# Altium PCB CR00045.PcbDoc
Units mm, origin at the board's own origin, x right, y up, seen from the top; angles counter-clockwise.
Board outline 18 x 19 mm, 4 copper layers (L 01 (Top), L 02, L 03, L 04), stack 1.959 mm thick; 17 components, 42 nets, 107 pads, 36 vias.
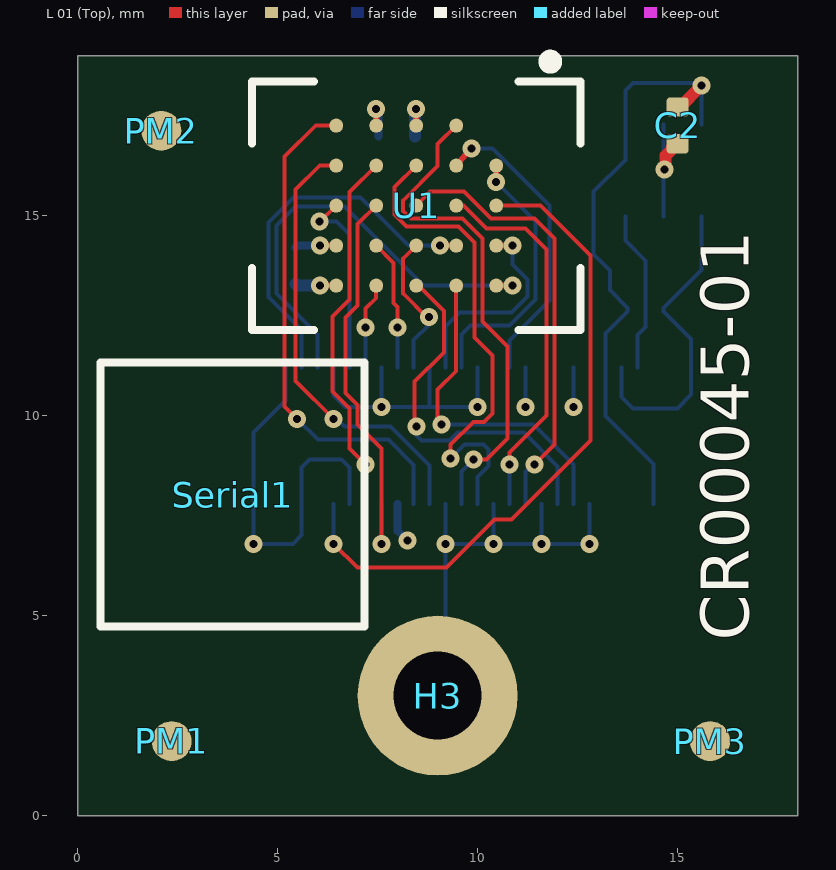
[diagram p0: L 01 (Top) view]
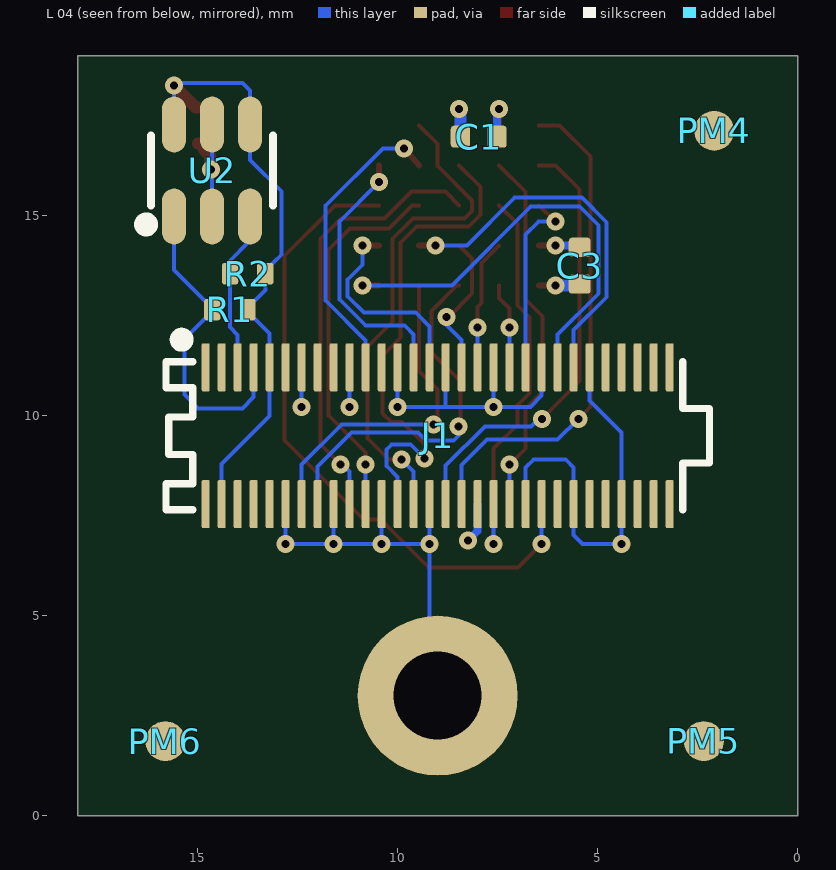
[diagram p1: L 04 view, seen from below]
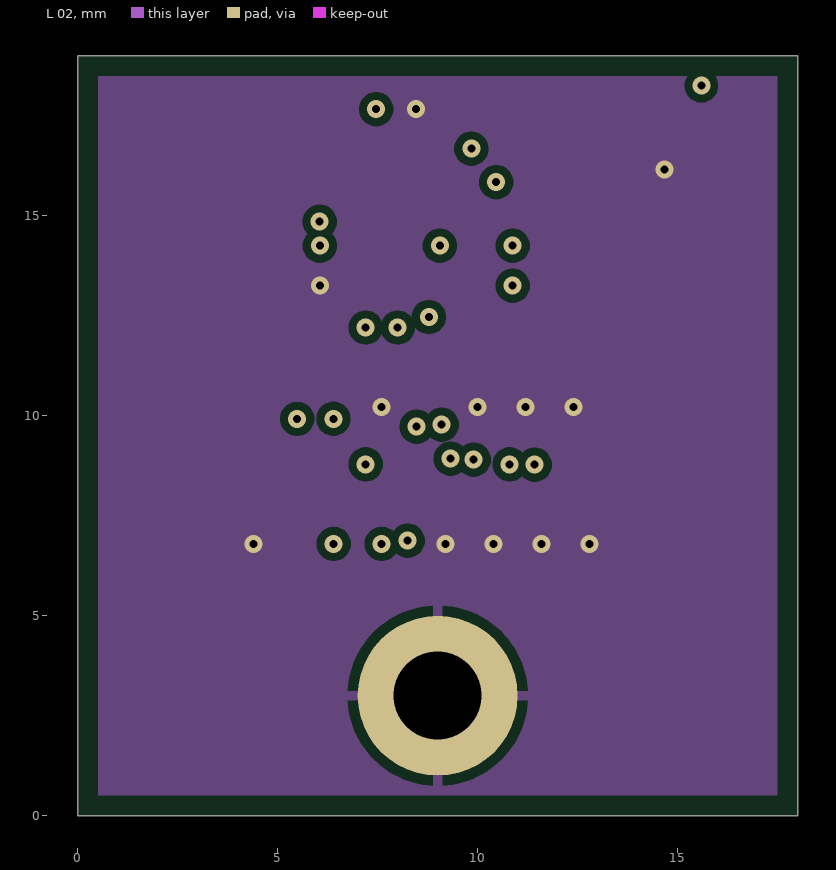
[diagram p2: L 02]
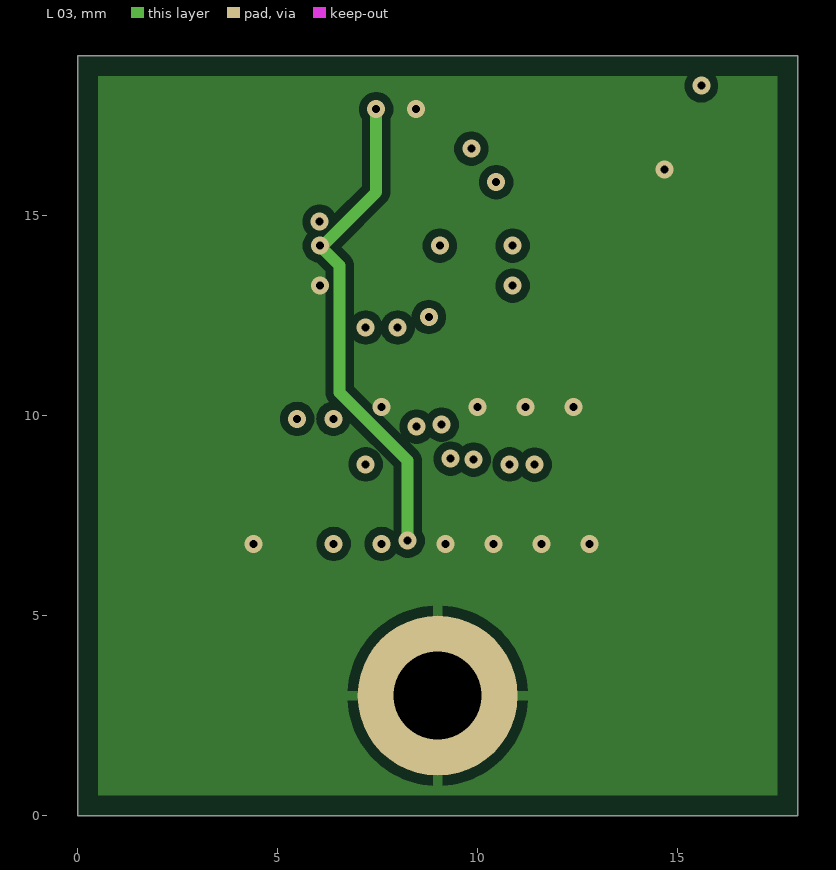
[diagram p3: L 03]

## Layer stack, top to bottom
Top Solder: solder mask 0.0102, Solder Resist, Dk 3.5
L 01 (Top): signal copper 0.053
Dielectric1: core 1.4, FR-4, Dk 4.2
L 02: signal copper 0.036
Dielectric 3: prepreg 0.127, Dk 4.2
L 03: signal copper 0.036
Dielectric 2: core 0.254, Dk 4.2
L 04: signal copper 0.053
Bottom Solder: solder mask 0.0102, Solder Resist, Dk 3.5

## Board outline
0,0 0,19 18.001,19 18.001,0

## Design rules (kind name [scope] priority, off if disabled: settings)
BoardOutlineClearance [All] p1: gap=0 except(0.5: Arc-OutlineEdge Track-OutlineEdge SMDPad-OutlineEdge THPad-OutlineEdge Via-OutlineEdge Fill-OutlineEdge Poly-OutlineEdge Region-OutlineEdge)
Clearance "HV Clearance" [(InNetClass('HV') AND InPolygon)] p1: gap=0.3
Clearance Clearance_ToUnplatedHole [IsPad and ( (HoleSize = 1.5) or (HoleSize = 3.25) ) vs (IsVia or IsTrack OR InPoly)] p2: gap=0.2
Clearance Clearance_DiffPair [(InDifferentialPairClass('All Differential Pairs')) vs (InPolygon)] p3: gap=0.3
Clearance Clearance_PolyToPoly [(InPolygon) vs InNamedPolygon('L01_U1_IN') or    InNamedPolygon('L01_U1_OUT') or InNamedPolygon('L01_U1_PGND')   or InNamedPolygon('L01_U2_IN') or    InNamedPolygon('L01_U2_OUT') or InNamedPolygon('L01_U2_PGND')] p4: gap=0.2
Clearance Clearance_Polygon [(InPolygon)] p5: gap=0.2 except(0.7: Poly-Poly)
Clearance [All] p6: gap=0.125 except(0.1: Track-Track Track-SMDPad Track-Via SMDPad-Via)
ComponentClearance ComponentClearance_logo [(HasFootprint('LOGO PRINT') or HasFootprint('FIDU-DOT - small'))] p1: gap=-0.05 collisioncheckmode=3 verticalgap=-0.1 showdistances=FALSE
ComponentClearance [All] p2: gap=-0.05 collisioncheckmode=3 verticalgap=0.254 showdistances=FALSE
DiffPairsRouting [InNetClass('Diff_IO') and not TouchesRoom('Room_MAX10')] p1: maxlimit=1 minlimit=0.16 mostfreqgap=1 toplayer_maxgap=0.16 toplayer_prefgap=0.16 toplayer_minwidth=0.11 toplayer_maxwidth=0.11 toplayer_prefwidth=0.11 midlayer1_mingap=1 midlayer1_minwidth=0.381 midlayer1_maxwidth=0.381 midlayer1_prefwidth=0.381 midlayer2_mingap=0.2 midlayer2_maxgap=0.2 midlayer2_prefgap=0.2 midlayer2_minwidth=0.1 midlayer2_maxwidth=0.1 midlayer2_prefwidth=0.1 bottomlayer_maxgap=0.16 bottomlayer_prefgap=0.16 bottomlayer_minwidth=0.11 bottomlayer_maxwidth=0.11 bottomlayer_prefwidth=0.11 maxuncoupledlength=2
FabricationTestPointUsage TestPointUsage [All] p1: valid=0 allowmultiple=FALSE
FabricationTestpoint Testpoint [All] p1: side=3 testpointundercomponent=TRUE minsize=1.016 maxsize=2.54 preferedsize=1.524 minholesize=0 maxholesize=1.016 preferedholesize=0.813 testpointgrid=0.025 allowsidetop=TRUE allowsidebottom=TRUE usegrid=TRUE gridtolerance=0
HoleSize [All] p1: absolutevalues=TRUE maxlimit=5 minlimit=0.2 maxpercent=80.000 minpercent=20.000
MinimumAnnularRing [All] p1: minimumring=0.15
MinimumSolderMaskSliver [All] p1: minsoldermaskwidth=0.1
PlaneClearance [All] p1: clearance=0.4
PlaneConnect [All] p1: planeconnectstyle=Direct reliefexpansion=0.508 reliefentries=4 reliefconductorwidth=0.254 reliefairgap=0.254
PolygonConnect [IsVia] p1: connectstyle=Direct reliefconductorwidth=0.254 reliefentries=4 polygonreliefangle="90 Angle" airgapwidth=0.254
PolygonConnect PolygonConnect_1 [All] p2: connectstyle=Relief reliefconductorwidth=0.254 reliefentries=4 polygonreliefangle="90 Angle" airgapwidth=0.254
RoutingCorners [All] p1: cornerstyle=Round minsetback=2 maxsetback=2
RoutingVias [All] p1: holewidth=0.3 width=0.6 viastyle="Through Hole" minholewidth=0.2 minwidth=0.5 maxholewidth=1 maxwidth=3
SilkToSilkClearance [All] p1: silktosilkclearance=0.025
SilkToSolderMaskClearance SilkscreenOverComponentPads [IsPad] p1: minsilkscreentomaskgap=0.01 clearancetoexposedcopper=TRUE
SolderMaskExpansion SolderMaskExpansion_VIA [(IsVia)] p1: expansion=0 soldermaskfromhole=TRUE
SolderMaskExpansion [All] p2: expansion=0
Width [All] p1: maxlimit=3 minlimit=0.1 preferedwidth=0.2 toplayer_prefwidth=0.1 midlayer1_minwidth=0.11 bottomlayer_prefwidth=0.1 minimp=50.000000 maximp=50.000000 favimp=50.000000 checkconnectedcopper=TRUE
19 further rules are at their usual default settings.

## Classes and differential pairs
component class CR00042: PM1 PM2 PM3 PM4 PM5 PM6 Serial1
component class CRUVI: C1 C2 C3 H3 J1 R1 R2 SNAP1 U1 U2

## Components (designator, comment, footprint, x,y, rotation, side; value= is the part's Value field where it differs from the comment)
C1 "470nF" CAPC1005X55N_V 7.975,16.975 r270 bottom
C2 "470nF" CAPC1005X55N_V 14.998,17.257 r0 top
C3 "470nF" CAPC1005X55N_V 5.45,13.75 r180 bottom
H3 "Mount.Hole 2mm" MHole2_2mm 9,3 r0 top locked
J1 "ST4-30-1.50-L-D-P-TR" ST4-30-1_50-L-D 9,9.5 r180 bottom locked
PM1 "FIDU-DOT - mini" "FIDU-DOT - mini" 2.348,1.865 r0 top
PM2 "FIDU-DOT - mini" "FIDU-DOT - mini" 2.089,17.124 r0 top
PM3 "FIDU-DOT - mini" "FIDU-DOT - mini" 15.808,1.865 r90 top
PM4 "FIDU-DOT - mini" "FIDU-DOT - mini" 2.089,17.124 r180 bottom
PM5 "FIDU-DOT - mini" "FIDU-DOT - mini" 2.348,1.865 r180 bottom
PM6 "FIDU-DOT - mini" "FIDU-DOT - mini" 15.808,1.865 r90 bottom
R1 "4K7" RESC1005X40N_V 14.195,12.653 r270 bottom
R2 "4K7" RESC1005X40N_V 13.75,13.55 r270 bottom
Serial1 "Serialnumber 6,3 x 6.3mm" Serial_6.3x6.3mm 3.875,8.025 r0 top
SNAP1 "SNAP CRUVI 3x" CRUVI_3X_SNAP 31.86,28 r0 top locked
U1 "APS25616N-OBR-BG NOT CHECKED!!!" BGA24C100P5X5_800X600X120N 8.463,15.251 r270 top locked
U2 "24AA025E48T-I/OT" SOT95P280X145-6N 14.641,16.132 r90 bottom locked

## Footprints (in the part's own frame and the unit in brackets; to place one, negate y for a bottom-side part, rotate by r counter-clockwise, add the part's x,y. Pads: shape width x height; smd on the part's side, far side on the other; paste and mask are expansions set on the pad)
BGA24C100P5X5_800X600X120N [mm]
  round 0.35 smd: A2(-1,2) A3(0,2) A4(1,2) A5(2,2) B1(-2,1) B2(-1,1) B3(0,1) B4(1,1) B5(2,1) C1(-2,0) C2(-1,0) C3(0,0) C4(1,0) C5(2,0) D1(-2,-1) D2(-1,-1) D3(0,-1) D4(1,-1) D5(2,-1) E1(-2,-2) E2(-1,-2) E3(0,-2) E4(1,-2) E5(2,-2)
  silkscreen extent -3.75,-4.11 3.11,4.11, body extent -3,-4 3,4, height 1.2
CAPC1005X55N_V [mm] "Vishay VJ0402 1 x 0.5mm (+/- 0.05), 0.25mm +0.05/-0.1mm Kontakte"
  rrect33% 0.55x0.48 smd: 1(0,0.46) 2(0,-0.46)
  body extent -0.25,-0.5 0.25,0.5, height 0.5
CRUVI_3X_SNAP [mm]
"FIDU-DOT - mini" [mm]
  round 1 smd paste-1: 0(0,0)
MHole2_2mm [mm]
  round 4 hole 2.2: 1(0,0)
RESC1005X40N_V [mm] "Vishay D0402 1 x 0.5mm (+/- 0.05), 0.2mm +/-0.1mm Kontakte"
  rrect33% 0.54x0.41 smd: 1(0,0.44) 2(0,-0.44)
  body extent -0.25,-0.5 0.25,0.5, height 0.4
Serial_6.3x6.3mm [mm]
  silkscreen extent -3.3,-3.3 3.3,3.3, body extent -3,-3 3,3, height 0.21
SOT95P280X145-6N [mm]
  oval 1.4x0.6 smd: 1(-1.15,0.95) 2(-1.15,0) 3(-1.15,-0.95) 4(1.15,-0.95) 5(1.15,0) 6(1.15,0.95)
  silkscreen extent -1.5,-1.53 0.87,1.8, body extent -1.35,-1.45 1.35,1.45, height 1.45
ST4-30-1_50-L-D [mm]
  rrect33% 0.2x1.2 smd: 1(-5.8,1.71) 2(-5.8,-1.71) 3(-5.4,1.71) 4(-5.4,-1.71) 5(-5,1.71) 6(-5,-1.71) 7(-4.6,1.71) 8(-4.6,-1.71) 9(-4.2,1.71) 10(-4.2,-1.71) 11(-3.8,1.71) 12(-3.8,-1.71) 13(-3.4,1.71) 14(-3.4,-1.71) 15(-3,1.71) 16(-3,-1.71) 17(-2.6,1.71) 18(-2.6,-1.71) 19(-2.2,1.71) 20(-2.2,-1.71) 21(-1.8,1.71) 22(-1.8,-1.71) 23(-1.4,1.71) 24(-1.4,-1.71) 25(-1,1.71) 26(-1,-1.71) 27(-0.6,1.71) 28(-0.6,-1.71) 29(-0.2,1.71) 30(-0.2,-1.71) 31(0.2,1.71) 32(0.2,-1.71) 33(0.6,1.71) 34(0.6,-1.71) 35(1,1.71) 36(1,-1.71) 37(1.4,1.71) 38(1.4,-1.71) 39(1.8,1.71) 40(1.8,-1.71) 41(2.2,1.71) 42(2.2,-1.71) 43(2.6,1.71) 44(2.6,-1.71) 45(3,1.71) 46(3,-1.71) 47(3.4,1.71) 48(3.4,-1.71) 49(3.8,1.71) 50(3.8,-1.71) 51(4.2,1.71) 52(4.2,-1.71) 53(4.6,1.71) 54(4.6,-1.71) 55(5,1.71) 56(5,-1.71) 57(5.4,1.71) 58(5.4,-1.71) 59(5.8,1.71) 60(5.8,-1.71)
  silkscreen extent -6.79,-1.85 6.79,2.55, body extent -6.87,-2 6.71,2, height 3.56

## Part data
C1 C2 C3: library part 23659, "KON 470nF 6,3V X5R SMD BF 1005 (0402)"
H3: library part 27273
J1: library part 29686
PM1 PM2 PM3 PM4 PM5 PM6: library part 27037, "FIDU-DOT - MINI 0.5mm"
R1 R2: library part 22585, "WID SMD 4K7 1% 0,063W BF 1005 (0402)"
Serial1: library part 26753
SNAP1: library part 29977, "SNAP for CRUVI 3x"
U1: library part 30935, "APS25616N-OBR-BG"
U2: library part 26249

## Via types
v1: diameter 0.45, hole 0.2, L 01 (Top) to L 04, 36 vias

## Nets (pads, with @x,y where several pads share a name; then routed paths per layer and width w, separated by ;. In a path a pad name is that pad's centre, name@x,y a point inside that pad or via, vN(x,y) a via of type N, cw(c..) or ccw(c..) an arc to the next point about the centre after c; other vN are vias at no path point)
+3.3V_D: C2.1 J1.4 J1.9 R1.1 R2.1 U2.4 U2.6 | length 15.6
  L 01 (Top) w0.3: C2.1@14.998,17.707 15.048,17.707 v1(15.591,18.249)
  L 04 w0.1: 13.115,13.816 13.305,13.626 13.305,13.143 13.75,12.698 13.75,12.608 13.2,12.058 J1.9 13.2,9.989 14.4,8.789 J1.4 ; 13.115,13.817 12.9,14.032 12.9,15.6 13.691,16.391 U2.4 13.691,18.131 13.878,18.318 15.591,18.318 v1(15.591,18.249) U2.6
+5.0V_D: J1.60
B0_N: J1.17
B0_P: J1.15
CE: J1.44 U1.A3 | length 16.5
  L 01 (Top) w0.1: v1(6.4,6.795) 6.995,6.2 9.225,6.2 10.425,7.4 10.85,7.4 12.825,9.375 12.825,14 11.574,15.251 U1.A3
  L 04 w0.1: v1(6.4,6.795) J1.44
CLK: J1.21 U1.B2 | length 7.6
  L 01 (Top) w0.15: U1.B2 9.789,16.626 9.809,16.635 9.849,16.655 v1@9.883,16.671
  L 04 w0.1: v1(9.839,16.676) 10.374,16.676 11.8,15.25 11.8,12.875 10.8,11.875 J1.21
D0: J1.38 U1.D3 | length 10.1
  L 01 (Top) w0.1: U1.D3 7,14.788 7,12.75 6.7,12.45 6.7,10.567 7,10.267 7,9.775 7.6,9.175 v1(7.6,6.795)
  L 04 w0.1: v1(7.6,6.795) J1.38
D1: J1.40 U1.D2 | length 9.3
  L 01 (Top) w0.1: v1(7.2,8.785) 6.8,9.185 6.8,10.184 6.375,10.609 6.375,12.475 6.8,12.9 6.8,15.588 U1.D2
  L 04 w0.1: J1.40 v1(7.2,8.785)
D2: J1.33 U1.C4 | length 3.6
  L 01 (Top) w0.1: U1.C4 8.138,13.926 8.138,13.05 v1@8.749,12.439
  L 04 w0.1: J1.33 8.4,11.892 8.777,12.269 v1(8.777,12.468)
D3: J1.35 U1.D4 | length 3.3
  L 01 (Top) w0.1: U1.D4 7.9,13.814 7.9,12.823 8,12.723 v1(8,12.205)
  L 04 w0.1: J1.35 v1(8,12.205)
D4: J1.39 U1.D5 | length 2.1
  L 01 (Top) w0.1: v1(7.2,12.205) 7.2,12.685 7.463,12.947 U1.D5
  L 04 w0.1: J1.39 v1(7.2,12.205)
D5: J1.41 U1.E3 | length 4.8
  L 01 (Top) w0.1: v1(6.05,14.85) 6.062,14.85 U1.E3
  L 04 w0.1: v1(6.05,14.85) 6.475,14.85 6.8,14.525 J1.41
D6: J1.32 U1.E2 | length 11.2
  L 01 (Top) w0.1: v1(6.393,9.924) 5.45,10.867 5.45,15.65 6.051,16.251 U1.E2
  L 04 w0.1: v1(6.393,9.924) 6.48,9.924 6.671,9.733 7.817,9.733 8.8,8.75 J1.32
D7: J1.34 U1.E1 | length 12.7
  L 01 (Top) w0.1: v1(5.485,9.921) 5.175,10.231 5.175,16.475 5.951,17.251 U1.E1
  L 04 w0.1: v1(5.485,9.921) 6.006,9.4 7.767,9.4 8.4,8.767 J1.34
D8: J1.26 U1.C2 | length 12.5
  L 01 (Top) w0.1: U1.C2 7.925,15.713 7.925,15.025 8.225,14.725 9.525,14.725 9.925,14.325 9.925,11.95 10.375,11.5 10.375,10.06 10.155,9.84 9.89,9.84 9.325,9.275 v1(9.325,8.925)
  L 04 w0.1: v1(9.325,8.925) 9.675,9.275 10.15,9.275 10.275,9.15 10.275,8.745 10,8.47 J1.26
D9: J1.28 U1.B1 | length 12.5
  L 01 (Top) w0.1: U1.B1 9,16.788 9,16.248 8.138,15.386 8.138,15.116 8.328,14.926 9.624,14.926 10.125,14.425 10.125,12.35 10.75,11.725 10.75,9.425 10.225,8.9 v1(9.9,8.9)
  L 04 w0.1: J1.28 9.6,8.6 v1(9.9,8.9)
D10: J1.27 U1.A2 | length 6.8
  L 01 (Top) w0.15: v1(10.463,15.839) U1.A2
  L 04 w0.1: J1.27 9.6,12.025 9.825,12.25 10.8,12.25 11.45,12.9 11.45,14.852 v1(10.463,15.839)
D11: J1.29 U1.A4 | length 5.2
  L 01 (Top) w0.15: U1.A4 v1(10.875,14.251)
  L 04 w0.1: J1.29 9.2,12.225 9.55,12.575 10.839,12.575 11.25,12.985 11.25,13.406 10.875,13.781 v1(10.875,14.251)
D12: J1.45 U1.A5 | length 11.3
  L 01 (Top) w0.15: U1.A5 v1(10.875,13.251)
  L 04 w0.1: J1.45 6,12.025 4.975,13.05 4.975,14.75 5.45,15.225 6.675,15.225 8.649,13.251 v1(10.875,13.251)
D13: J1.47 U1.B4 | length 9.4
  L 01 (Top) w0.15: v1(9.051,14.251) U1.B4
  L 04 w0.1: J1.47 5.6,12.142 4.775,12.967 4.775,14.833 5.392,15.45 7.075,15.45 8.274,14.251 v1(9.051,14.251)
D14: J1.14 U1.B5 | length 8.4
  L 01 (Top) w0.1: v1@9,9.85 9,10.65 9.463,11.113 U1.B5
  L 04 w0.1: v1@9,9.675 v1(9.1,9.775) 11.4,9.775 12.4,8.775 J1.14
D15: J1.16 U1.C5 | length 9.3
  L 01 (Top) w0.1: v1@8.425,9.775 8.425,10.85 9.152,11.577 9.152,12.623 8.525,13.251 U1.C5
  L 04 w0.1: v1@8.425,9.775 v1(8.475,9.725) 8.475,9.5 8.6,9.375 9.289,9.375 9.489,9.575 11.155,9.575 12,8.73 J1.16
DM0: J1.20 U1.C3 | length 11.1
  L 01 (Top) w0.1: U1.C3 8.812,15.6 9.654,15.6 10.328,14.926 11.424,14.926 11.925,14.425 11.925,9.275 v1(11.425,8.775)
  L 04 w0.1: J1.20 11.2,8.6 11.375,8.775 v1(11.425,8.775)
DM1: J1.22 U1.B3 | length 9.5
  L 01 (Top) w0.1: U1.B3 9.649,15.251 10.223,14.677 11.198,14.677 11.725,14.15 11.725,10 10.8,9.075 v1(10.8,8.785)
  L 04 w0.1: J1.22 v1(10.8,8.785)
GND: C1.2 C2.2 C3.2 H3.1 J1.12 J1.13 J1.18 J1.19 J1.24 J1.25 J1.30 J1.31 J1.37 J1.42 J1.43 J1.48 J1.49 J1.54 U1.C1 U1.E5 U2.2 U2.5 | length 36.1
  L 01 (Top) w0.15: v1(6.051,13.251) U1.E5 ; U1.C1 v1(8.463,17.663)
  L 01 (Top) w0.2: v1@14.641,16.132 v1(14.67,16.161) v1@14.698,16.189
  L 01 (Top) w0.3: v1@14.698,16.189 14.698,16.507 14.848,16.657 14.848,16.707 14.948,16.807 C2.2@14.998,16.807
  L 04 w0.1: J1.49 5.2,10.378 4.4,9.578 J1.54 v1(4.4,6.795) 5.383,6.795 5.6,7.013 J1.48 5.6,8.7 5.8,8.9 6.6,8.9 6.8,8.7 J1.42 ; J1.43 6.4,10.5 6.685,10.215 v1(7.6,10.215) ; J1.37 v1(7.6,10.215) ; J1.31 8.8,10.215 ; H3.1 9.2,3.2 v1(9.2,6.795) ; J1.30 v1(9.2,6.795) ; J1.25 v1(10,10.215) 8.8,10.215 ; J1.24 v1(10.4,6.795) ; v1(11.2,10.215) J1.19 ; J1.18 v1(11.6,6.795) ; v1(12.4,10.215) J1.13 ; J1.12 v1(12.8,6.795) v1(11.6,6.795) ; U2.2 U2.5 ; v1(7.6,10.215) 8.8,10.215 ; v1(9.2,6.795) v1(10.4,6.795) ; v1(10.4,6.795) v1(11.6,6.795)
  L 04 w0.3: C3.2 5.489,13.251 v1(6.051,13.251) ; C1.2 8.435,17.635 v1(8.463,17.663)
HSI: J1.10
HSIO: J1.2
HSO: J1.6
JTAGEN: J1.57
REFCLK: J1.11
RESET: J1.8
RFU1: J1.1
SMB_ALERT: J1.3
SMB_SCL: J1.7 R1.2 U2.1 | length 7.9
  L 04 w0.1: J1.7 13.6,10.463 13.882,10.181 14.992,10.181 15.336,10.525 15.336,11.913 14.64,12.608 14.64,12.698 15.591,13.648 U2.1
SMB_SDA: J1.5 R2.2 U2.3 | length 4.1
  L 04 w0.1: U2.3 13.691,14.378 14.195,13.874 14.195,12.215 14,12.02 J1.5
TCK: J1.59
TDI: J1.51
TDO: J1.53
TMS: J1.55
USB_N: J1.58
USB_P: J1.56
VADJ: C1.1 C3.1 J1.36 U1.D1 U1.E4 | length 15.5
  L 01 (Top) w0.15: v1(6.051,14.251) U1.E4 ; U1.D1 v1(7.463,17.663)
  L 03 w0.3: v1(7.463,17.663) 7.463,15.591 6.123,14.251 v1(6.051,14.251) 6.55,13.752 6.55,10.575 8.248,8.877 v1(8.248,6.875)
  L 04 w0.2: C3.1 5.491,14.251 v1(6.051,14.251) ; v1(7.463,17.663) 7.515,17.611 C1.1 ; J1.36 8,7.123 v1(8.248,6.875)
pads on no net: J1.23 J1.46 J1.50 J1.52 PM1.0 PM2.0 PM3.0 PM4.0 PM5.0 PM6.0

## Polygon pours and split planes (outlines as drawn)
GND on L 02 "GND_L02_P000" (solid, remove dead copper, pour order 0): 0,19 0,0 18,0 18.001,19
GND on L 03 "GND_L03_P002" (solid, remove dead copper, pour order 2): 0,19 0,0 18.001,0 18,19

## Silkscreen, mask and mechanical layers (free items; w line width, h text height)
Top Overlay:
  text "CR00045-01" at 16.775,4.375 h1.2 r90
Dim-Top-GM1:
  text "Top View" at 0.542,23.515 h2
Dim-Bot-GM2:
  text "Top View" at 0.542,23.515 h2
PCB-Outline-GM6:
  the board outline again, w0.01
Assembly-Top-GM13:
  text "'.Project'-'.Revision'-'.VariantName'" at 1.109,27.951 h1.5
  text "Variant name:" at -14.891,27.88 h1.5
  text "Top View" at 0.542,23.519 h2
Assembly-Bot-GM14:
  text "'.Project'-'.Revision'-'.VariantName'" at 13.656,27.951 h1.5
  text "Variant name:" at 29.656,27.88 h1.5
  text "Bottom View" at 18.083,23.443 h2

## Dimensions
9,3 to 18.001,0 on Dim-Top-GM1
10,9.5 to 9,3 on Dim-Top-GM1
18.001,19 to 18.001,0 on Dim-Top-GM1
0,0 to 18.001,0 on Dim-Top-GM1

## Text inside footprints (layer, text, board x,y; h text height)
J1: Assembly-Bot-GM14 "59" at 4.1,10.5 h0.5; Assembly-Bot-GM14 "60" at 4.1,8 h0.5; Assembly-Bot-GM14 "2" at 14.8,8 h0.5; Assembly-Bot-GM14 "1" at 14.717,10.5 h0.5
Serial1: Assembly-Top-GM13 "SerialNr" at 1.459,11.418 h0.7
SNAP1: TDev-Notes-Top-GM11 "LS A connector" at 2.8,25.725 h0.7; TDev-Notes-Top-GM11 "LS B connector" at 25.66,25.75 h0.7; TDev-Notes-Top-GM11 "LS C connector" at 48.52,25.75 h0.7; TDev-Notes-Top-GM11 "HS Z connector" at 46.82,12.9 h0.7; TDev-Notes-Top-GM11 "HS Y connector" at 23.96,12.9 h0.7; TDev-Notes-Top-GM11 "HS X connector" at 1.1,12.9 h0.7; TDev-Notes-Top-GM11 "11" at 3.14,27 h0.7; TDev-Notes-Top-GM11 "12" at 3.14,32.1 h0.7; TDev-Notes-Top-GM11 "2" at 14.24,32.1 h0.7; TDev-Notes-Top-GM11 "1" at 14.44,27 h0.7; TDev-Notes-Top-GM11 "60" at 1.6,6.8 h0.7; TDev-Notes-Top-GM11 "59" at 1.6,11.6 h0.7; TDev-Notes-Top-GM11 "1" at 15.4,11.6 h0.7; TDev-Notes-Top-GM11 "2" at 15.3,6.8 h0.7; TDev-Notes-Top-GM11 "1" at 37.3,27 h0.7; TDev-Notes-Top-GM11 "2" at 37.1,32.1 h0.7; TDev-Notes-Top-GM11 "12" at 26,32.1 h0.7; TDev-Notes-Top-GM11 "11" at 26,27 h0.7; TDev-Notes-Top-GM11 "2" at 38.16,6.8 h0.7; TDev-Notes-Top-GM11 "1" at 38.26,11.6 h0.7; TDev-Notes-Top-GM11 "59" at 24.46,11.6 h0.7; TDev-Notes-Top-GM11 "60" at 24.46,6.8 h0.7; TDev-Notes-Top-GM11 "60" at 47.32,6.8 h0.7; TDev-Notes-Top-GM11 "59" at 47.32,11.6 h0.7; TDev-Notes-Top-GM11 "1" at 61.12,11.6 h0.7; TDev-Notes-Top-GM11 "2" at 61.02,6.8 h0.7; TDev-Notes-Top-GM11 "11" at 48.86,27 h0.7; TDev-Notes-Top-GM11 "12" at 48.86,32.1 h0.7; TDev-Notes-Top-GM11 "2" at 59.96,32.1 h0.7; TDev-Notes-Top-GM11 "1" at 60.16,27 h0.7